# Altium PCB IgniterPCB.PcbDoc
Units mil, origin at the board's own origin, x right, y up, seen from the top; angles counter-clockwise.
Board outline 3000 x 2500 mil, 2 copper layers (Top Layer, Bottom Layer); 42 components, 23 nets, 199 pads, 25 vias.
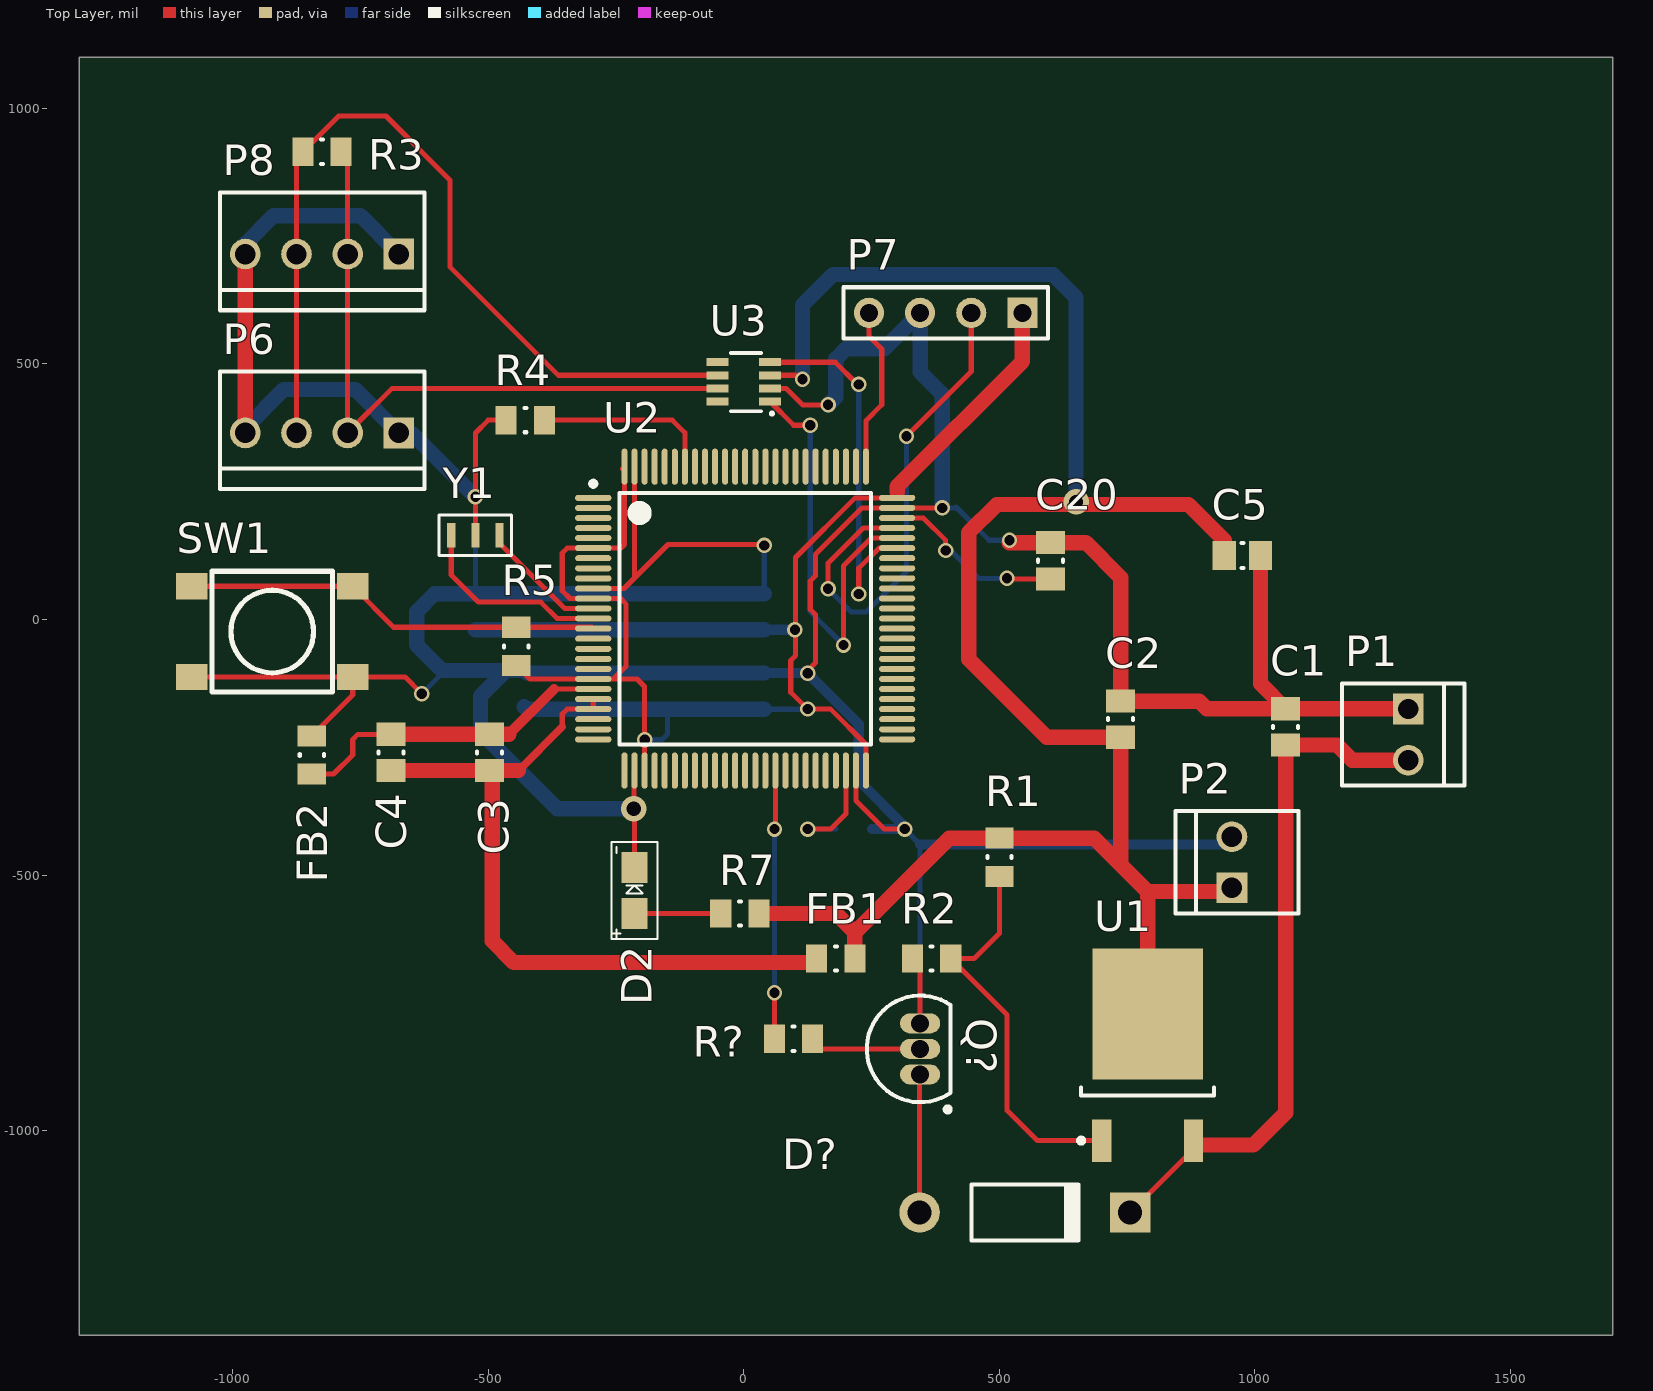
[diagram p0: Top Layer view]
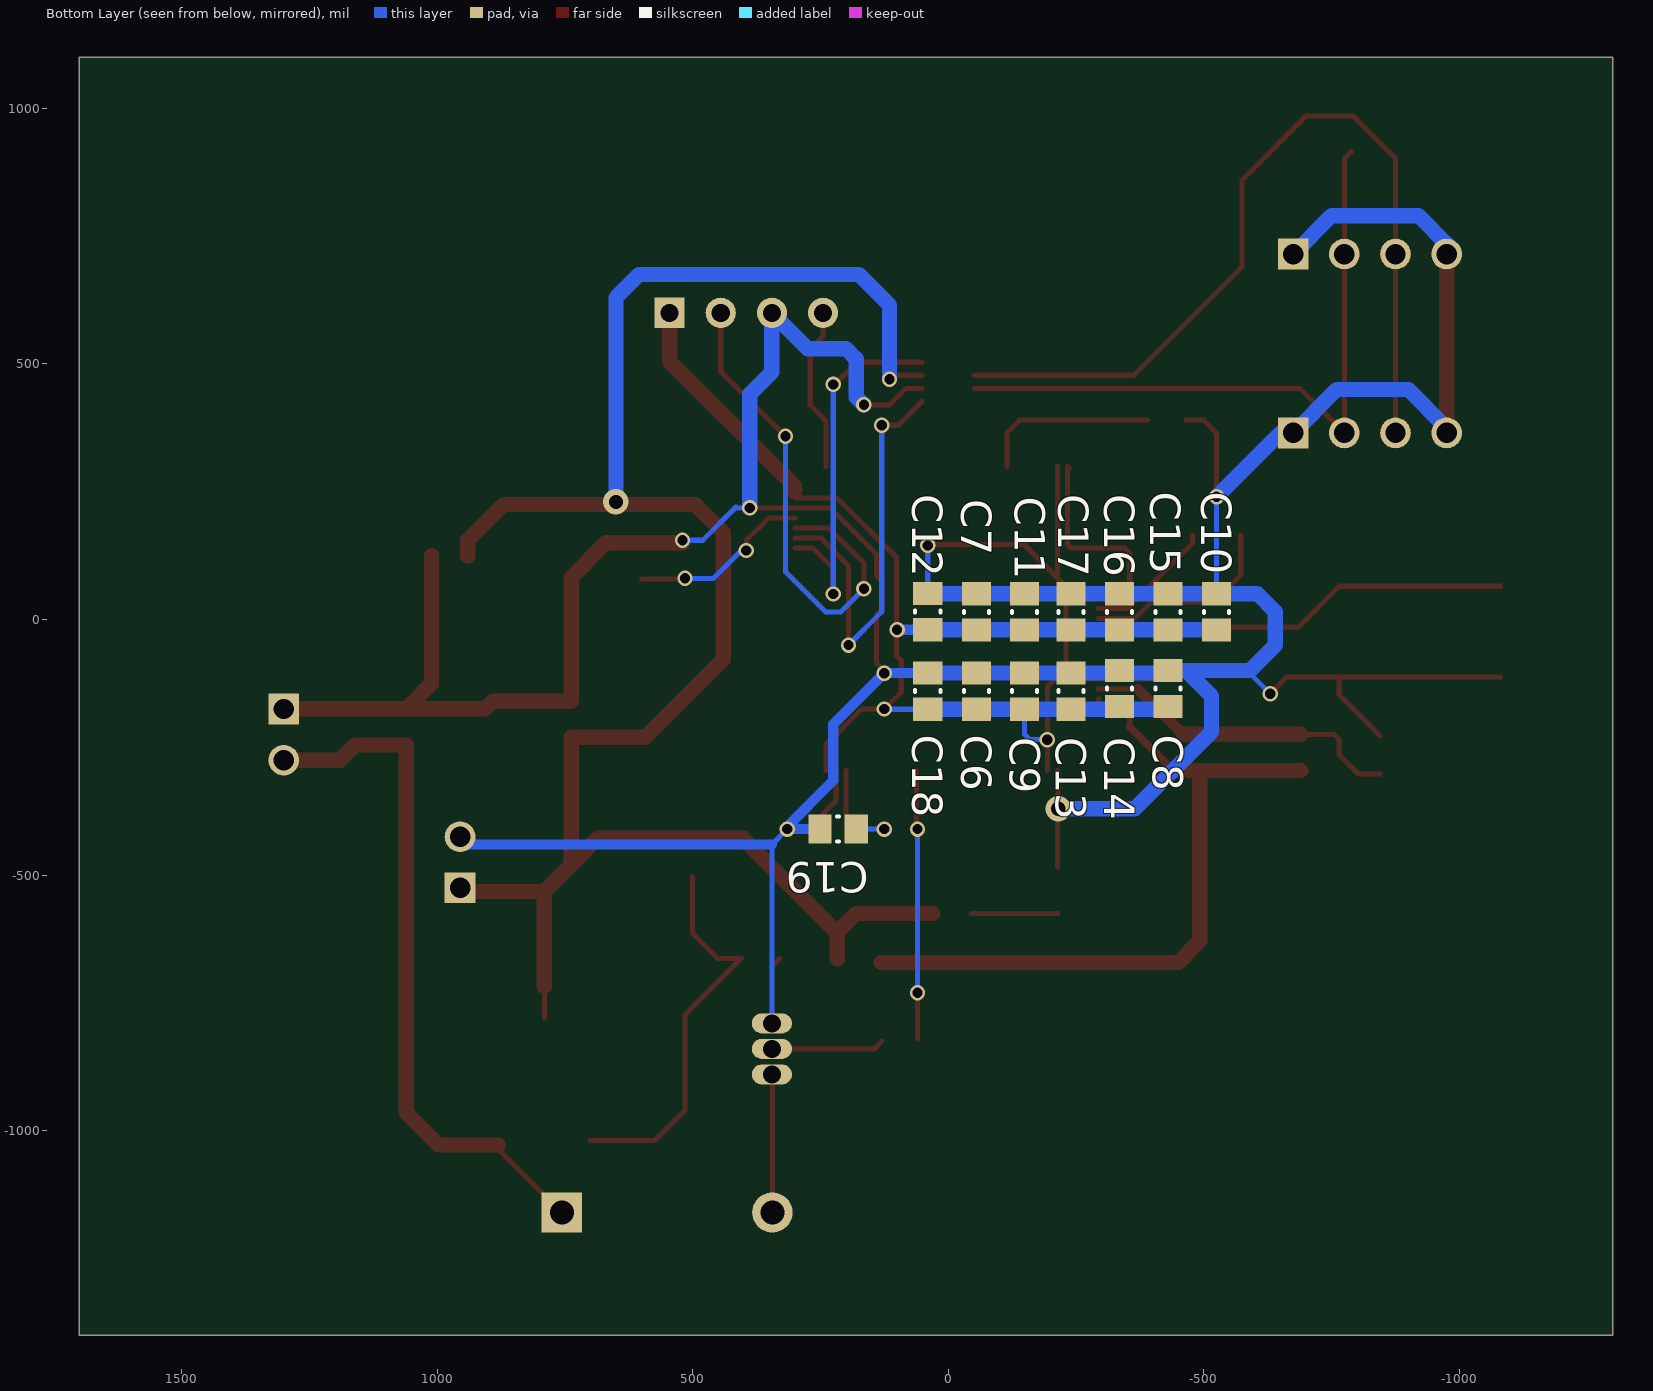
[diagram p1: Bottom Layer view, seen from below]
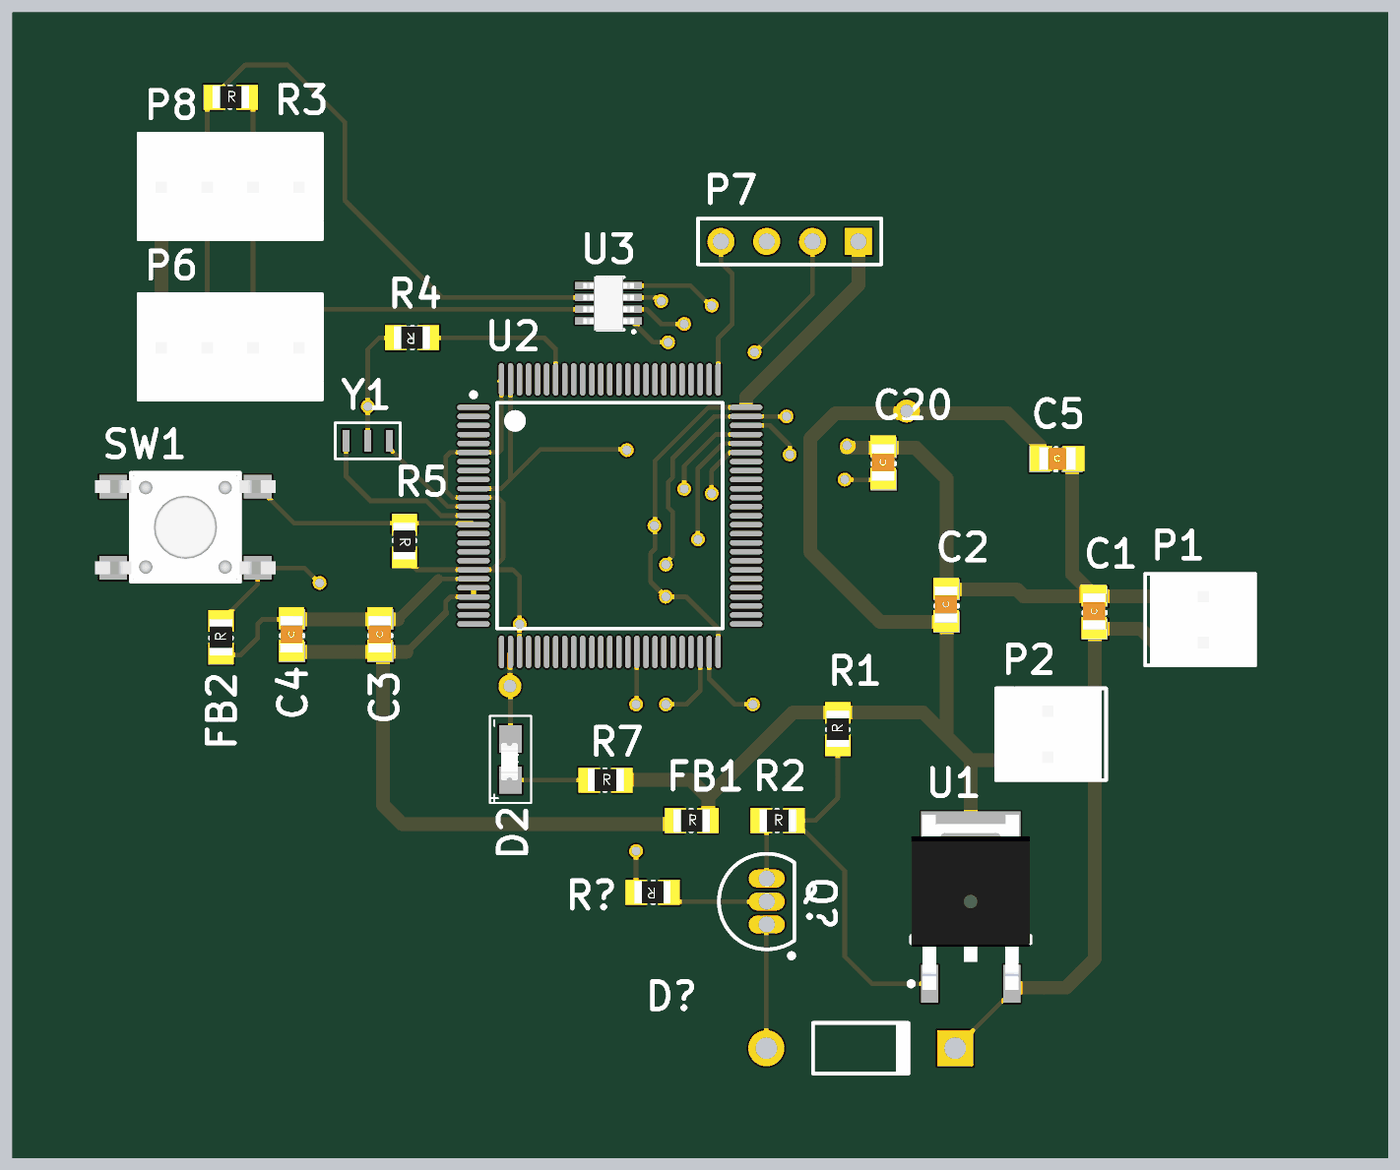
[diagram p2: 3D render of the assembled board from above, using the file's embedded part models]
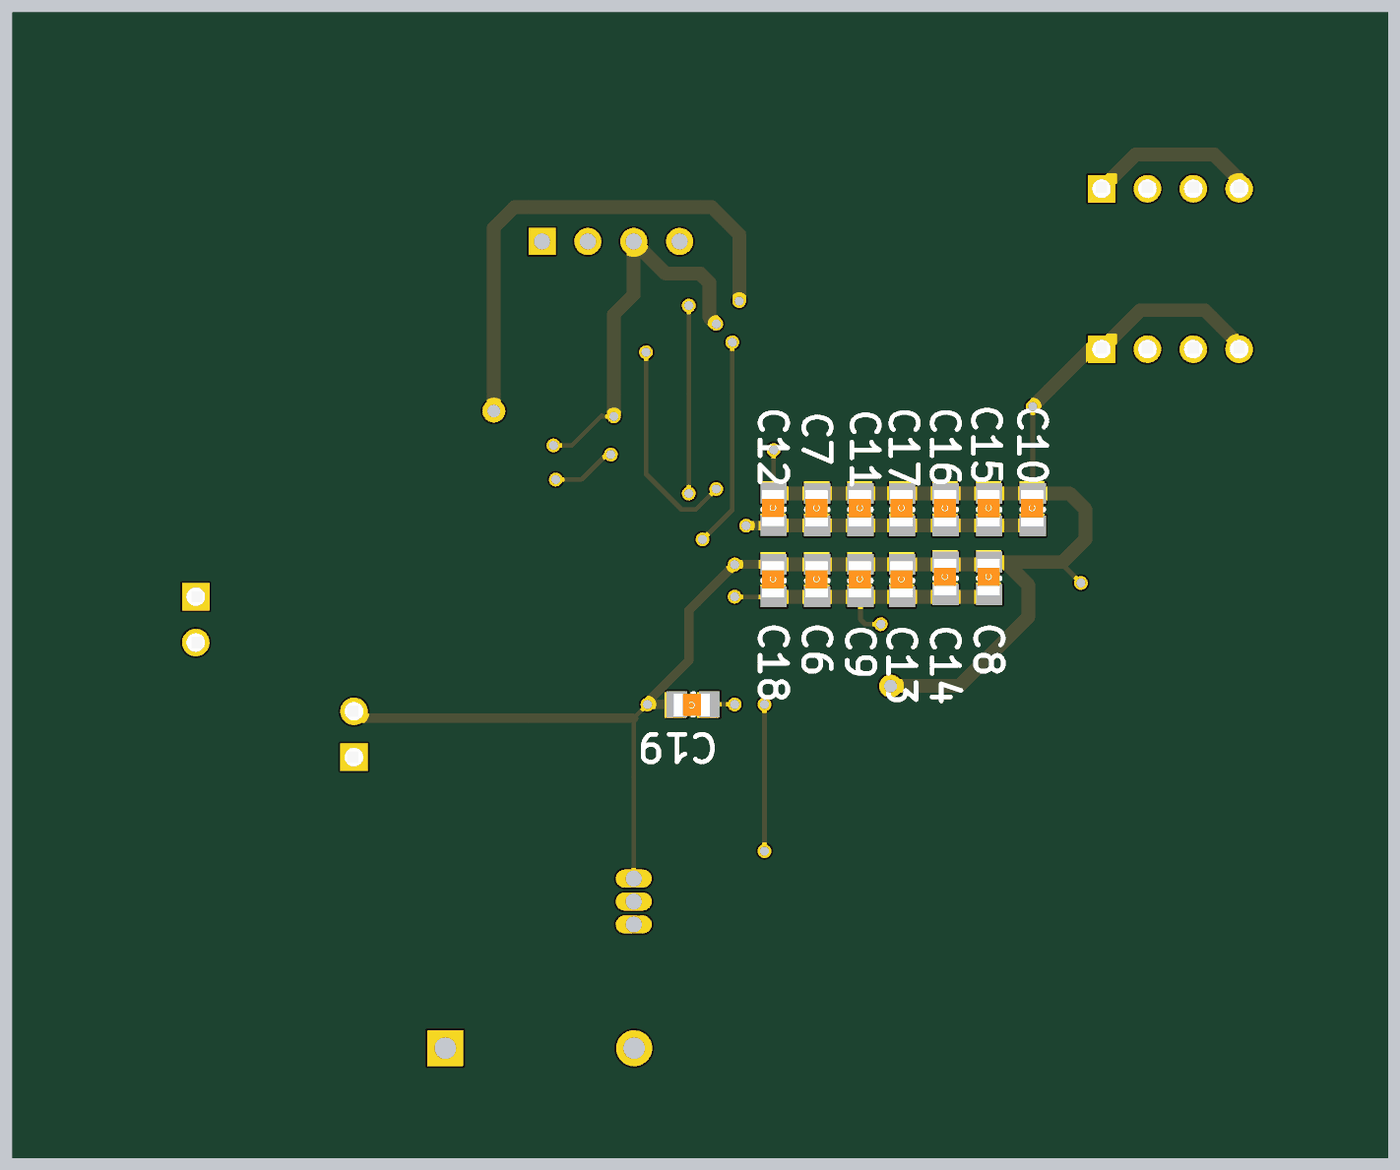
[diagram p3: 3D render of the assembled board from below, using the file's embedded part models]

## Layer stack, top to bottom
Top Solder: solder mask 0.4, Solder Resist, Dk 3.5
Top Layer: signal copper 1.4
Dielectric 1: dielectric 12.6, FR-4, Dk 4.8
Bottom Layer: signal copper 1.4
Bottom Solder: solder mask 0.4, Solder Resist, Dk 3.5

## Board outline
-1300,1100 -1300,-1400 1700,-1400 1700,1100

## Design rules (kind name [scope] priority, off if disabled: settings)
Clearance "Power-to-Non Clearance" [InNetClass('Power')] p1: gap=10 ignorepadtopadclearanceinfootprint=FALSE except(0: Arc-Text Arc-Hole Track-Text Track-Hole SMDPad-Text SMDPad-Hole THPad-Text THPad-Hole Via-Text Via-Hole Fill-Text Fill-Hole Poly-Text Poly-Hole Region-Text Region-Hole Text-Text Text-Hole)
Clearance "Power-to-Power Clearance" [InNetClass('Power') vs InNetClass('Power')] p2: gap=10 ignorepadtopadclearanceinfootprint=FALSE except(0: Arc-Text Arc-Hole Track-Text Track-Hole SMDPad-Text SMDPad-Hole THPad-Text THPad-Hole Via-Text Via-Hole Fill-Text Fill-Hole Poly-Text Poly-Hole Region-Text Region-Hole Text-Text Text-Hole)
Clearance [All] p3: gap=10 ignorepadtopadclearanceinfootprint=TRUE except(0: Arc-Text Arc-Hole Track-Text Track-Hole SMDPad-Text SMDPad-Hole THPad-Text THPad-Hole Via-Text Via-Hole Fill-Text Fill-Hole Poly-Text Poly-Hole Region-Text Region-Hole Text-Text Text-Hole; 2: Arc-Arc Arc-Track Arc-SMDPad Track-Track Track-SMDPad; 5: Arc-Via Track-Via)
MinimumSolderMaskSliver [All] p1 off: minsoldermaskwidth=1.5
PolygonConnect [All] p1: connectstyle=Relief reliefconductorwidth=10 reliefentries=4 polygonreliefangle="90 Angle" airgapwidth=10
RoutingVias [All] p1: holewidth=28 width=50 viastyle="Through Hole" minholewidth=7.87 minwidth=17.72 maxholewidth=28 maxwidth=50
SilkToSolderMaskClearance [IsPad] p1 off: minsilkscreentomaskgap=10 clearancetoexposedcopper=TRUE
SolderMaskExpansion [All] p1: expansion=4
Width "Power Width" [InNetClass('Power')] p1: maxlimit=45 minlimit=10 preferedwidth=10 minimp=50.000000 maximp=50.000000 favimp=50.000000
Width [All] p2: maxlimit=30 minlimit=10 preferedwidth=10 minimp=50.000000 maximp=50.000000 favimp=50.000000
28 further rules are at their usual default settings.

## Classes and differential pairs
component class U_Power: C1 C2 D2 FB1 FB2 P1 P2 R1 R2 R7 U1
component class micro_schematic: C3 C4 C5 C6 C7 C8 C9 C10 C11 C12 C13 C14 C15 C16 C17 C18 C19 C20 P6 P7 P8 R3 R4 R5 SW1 U2 U3 Y1
component class Designator: D1 Q1 R6 U?

## Components (designator, comment, footprint, x,y, rotation, side; value= is the part's Value field where it differs from the comment)
C1 "0.1uF" C0805 1060,-210 r90 top
C2 "1uF" C0805 737.24,-195 r90 top
C3 "100n" C0805 -497.4,-260 r90 top
C4 "1u" C0805 -690,-260 r90 top
C5 "0.1uF" C0805 975.43,125 r0 top
C6 "100n" C0805 -55,-140 r90 bottom
C7 "100n" C0805 -55,15 r90 bottom
C8 "100n" C0805 -430,-135 r90 bottom
C9 "100n" C0805 -149.28,-140 r90 bottom
C10 "4u7" C0805 -525,15 r90 bottom
C11 "100n" C0805 -149.28,15 r90 bottom
C12 "100n" C0805 40,15.43 r90 bottom
C13 "100n" C0805 -240,-140 r90 bottom
C14 "100n" C0805 -335,-135 r90 bottom
C15 "100n" C0805 -430,15 r90 bottom
C16 "100n" C0805 -335,15 r90 bottom
C17 "100n" C0805 -240,15 r90 bottom
C18 "100n" C0805 40,-140 r90 bottom
C19 "*" C0805 215.43,-410 r0 bottom
C20 "*" C0805 600,115 r90 top
D2 "LED" 0805LED -213.7,-575 r90 top
D? "Diode 1N4007" DO-41 550,-1160 r0 top
FB1 "FERRITE" R0805 180,-663.34 r0 top
FB2 "FERRITE" R0805 -845,-265 r90 top
P1 "Molex KK 1x2" "Molex KK 2x1" 1300,-225 r0 top
P2 "Molex KK 1x2" "Molex KK 2x1" 955,-475 r180 top
P6 "Molex KK 1x4" "Molex KK 4x1" -875,365 r270 top
P7 "Header 4" HDR1X4 545,600 r180 top
P8 "Molex KK 1x4" "Molex KK 4x1" -875,715 r270 top
Q? "NPN" TO-226-AA 345,-840 r0 top
R1 "240R" R0805 500,-465 r90 top
R2 "390R" R0805 367.6,-663.34 r0 top
R3 "120R" R0805 -825,915 r0 top
R4 "100R" R0805 -427.4,390 r180 top
R5 "1k" R0805 -445,-52.4 r270 top
R7 "2k" R0805 -7.6,-575 r0 top
R? "1K" R0805 97.4,-820 r180 top
SW1 "Push Switch" PUSHBUTTON -922.48,-23.58 r0 top
U1 "LM317" D-PAK 790,-852.12 r90 top
U2 "MC-ARM-STM32F446-LQFP100" STM-LQFP100_N 2.83,1.81 r0 top
U3 "TCAN332DCNT" SOT-23-8 0,465 r90 top
Y1 "CSTCE8M00" "8MHz Ceramic Resonator" -572.24,165 r0 top

## Footprints (in the part's own frame and the unit in brackets; to place one, negate y for a bottom-side part, rotate by r counter-clockwise, add the part's x,y. Pads: shape width x height; smd on the part's side, far side on the other; paste and mask are expansions set on the pad)
"8MHz Ceramic Resonator" [mm] "8MHz Ceramic Resonator Murata"
  rect 0.4x1.2 smd: 1(0,0) 2(1.2,0) 3(2.4,0)
  silkscreen extent -0.6,-1 3,1
0805LED [mil]
  rect 60x50 smd: A(0,0) K(90,0)
  silkscreen extent -50,-45 140,45, body extent -1,-16 81,20, height 33
C0805 [mm] "Chip Capacitor, Body 2.0x1.2mm, Height 0.75mm, IPC Medium Density"
  rect 1.15x1.45 smd: 1(-0.9,0) 2(0.9,0)
  silkscreen extent -0.05,-0.62 0.05,0.62, body extent -1.42,-0.67 1.58,0.73, height 0.93
D-PAK [mm] "D-PAK, 4-Leads, Body 6.1x6.5mm, Pitch 2.28mm, Lead Span 9.7mm, IPC Medium Density"
  rect 2.1x0.95 smd: 1(-4.25,2.28) 3(-4.25,-2.28)
  rect 6.5x5.5 smd: 4(2.05,0)
  silkscreen extent -4.37,-3.3 -1.6,3.43, body extent -4.6,-3.28 5.1,3.3, height 2.3
DO-41 [mm] "Diode, Axial; Body 5.2 x 2.7 mm (LxDia. max), Lead Dia. 0.86 mm (max)"
  round 2 hole 1.2: 1(-5.23,0)
  rect 2x2 hole 1.2: 2(5.23,0)
  silkscreen extent -2.65,-1.4 2.75,1.4
HDR1X4 [mm] "Connector; Header; 4 Position"
  rect 1.5x1.5 hole 0.9: 1(0,0)
  round 1.5 hole 0.9: 2(2.54,0) 3(5.08,0) 4(7.62,0)
  silkscreen extent -1.27,-1.27 8.89,1.27
"Molex KK 2x1" [mil]
  rect 60x60 hole 40: 1(0,50)
  round 60 hole 40: 2(0,-50)
  silkscreen extent -130,-100 110,100, body extent -120,-100 110,100, height 458
"Molex KK 4x1" [mil]
  rect 60x60 hole 40: 1(0,200)
  round 60 hole 40: 2(0,100) 3(0,0) 4(0,-100)
  silkscreen extent -120,-150 110,250, body extent -120,-150 110,250, height 458
PUSHBUTTON [mm]
  rect 1.55x1.3 smd: 1(-4,2.25) 1(4,2.25) 2(-4,-2.25) 2(4,-2.25)
  silkscreen extent -3,-3 3,3, body extent -5,-3 5,3, height 5.12
R0805 [mm] "Chip Resistor, Body 2.0x1.3mm, IPC Medium Density"
  rect 1.05x1.4 smd: 1(-0.95,0) 2(0.95,0)
  silkscreen extent -0.05,-0.6 0.05,0.6, body extent -1.46,-0.7 1.54,0.7, height 0.53
SOT-23-8 [mm] "SOT-23-8"
  rect 0.4x1.1 smd: 1(-0.975,-1.3) 2(-0.325,-1.3) 3(0.325,-1.3) 4(0.975,-1.3) 5(0.975,1.3) 6(0.325,1.3) 7(-0.325,1.3) 8(-0.975,1.3)
  silkscreen extent -1.65,-1.48 1.44,0.65, body extent -1.5,-1.4 1.5,1.4, height 1.11
STM-LQFP100_N [mm] "Thin QFP, 100-Leads, Body 14x14mm, Pitch 0.5mm, IPC Medium Density"
  oval 1.8x0.3 smd: 1(-7.55,6) 2(-7.55,5.5) 3(-7.55,5) 4(-7.55,4.5) 5(-7.55,4) 6(-7.55,3.5) 7(-7.55,3) 8(-7.55,2.5) 9(-7.55,2) 10(-7.55,1.5) 11(-7.55,1) 12(-7.55,0.5) 13(-7.55,0) 14(-7.55,-0.5) 15(-7.55,-1) 16(-7.55,-1.5) 17(-7.55,-2) 18(-7.55,-2.5) 19(-7.55,-3) 20(-7.55,-3.5) 21(-7.55,-4) 22(-7.55,-4.5) 23(-7.55,-5) 24(-7.55,-5.5) 25(-7.55,-6) 51(7.55,-6) 52(7.55,-5.5) 53(7.55,-5) 54(7.55,-4.5) 55(7.55,-4) 56(7.55,-3.5) 57(7.55,-3) 58(7.55,-2.5) 59(7.55,-2) 60(7.55,-1.5) 61(7.55,-1) 62(7.55,-0.5) 63(7.55,0) 64(7.55,0.5) 65(7.55,1) 66(7.55,1.5) 67(7.55,2) 68(7.55,2.5) 69(7.55,3) 70(7.55,3.5) 71(7.55,4) 72(7.55,4.5) 73(7.55,5) 74(7.55,5.5) 75(7.55,6)
  oval 0.3x1.8 smd: 26(-6,-7.55) 27(-5.5,-7.55) 28(-5,-7.55) 29(-4.5,-7.55) 30(-4,-7.55) 31(-3.5,-7.55) 32(-3,-7.55) 33(-2.5,-7.55) 34(-2,-7.55) 35(-1.5,-7.55) 36(-1,-7.55) 37(-0.5,-7.55) 38(0,-7.55) 39(0.5,-7.55) 40(1,-7.55) 41(1.5,-7.55) 42(2,-7.55) 43(2.5,-7.55) 44(3,-7.55) 45(3.5,-7.55) 46(4,-7.55) 47(4.5,-7.55) 48(5,-7.55) 49(5.5,-7.55) 50(6,-7.55) 76(6,7.55) 77(5.5,7.55) 78(5,7.55) 79(4.5,7.55) 80(4,7.55) 81(3.5,7.55) 82(3,7.55) 83(2.5,7.55) 84(2,7.55) 85(1.5,7.55) 86(1,7.55) 87(0.5,7.55) 88(0,7.55) 89(-0.5,7.55) 90(-1,7.55) 91(-1.5,7.55) 92(-2,7.55) 93(-2.5,7.55) 94(-3,7.55) 95(-3.5,7.55) 96(-4,7.55) 97(-4.5,7.55) 98(-5,7.55) 99(-5.5,7.55) 100(-6,7.55)
  silkscreen extent -7.67,-6.25 6.25,6.82, body extent -7,-7 7,7, height 1.6
TO-226-AA [mm] "TO, Flat Index; 3 In-Line, Axial Leads; Body Dia. 4.8mm; Leads 0.55 x 0.51 mm (max)"
  oval 2x1 hole 0.9: 1(0,-1.27) 2(0,0) 3(0,1.27)
  silkscreen extent -2.65,-3.13 1.52,2.65, body extent -2.65,-2.66 1.52,2.66, height 5.33

## Part data
C1 C2 C3 C4 C5 C6 C7 C8 C9 C10 C11 C12 C13 C14 C15 C16 C17 C18 C19 C20: library part C0805, "0805 Capacitor"
D2: Manufacturer="OSRAM Opto Semiconductors Inc", Manufacturer Part Number="LS T676-Q1R2-1-Z", Reel=D13
D?: "1 Amp General Purpose Rectifier", Code_JEDEC=DO-204-AL, ComponentLink1Description="Manufacturer Link", ComponentLink1URL=http://www.fairchildsemi.com/, ComponentLink2Description=Datasheet, ComponentLink2URL=http://www.fairchildsemi.com/ds/1N%2F1N4001.pdf, DatasheetVersion=1998, LatestRevisionDate=17-Jul-2002, LatestRevisionNote="Re-released for DXP Platform.", PackageDescription="Diode, Axial; Body 5.2 x 2.7 mm (LxDia. max), Lead Dia. 0.86 mm (max)", PackageReference=DO-41, PackageVersion=Aug-1999, Published=8-Jun-2000, Publisher="Altium Limited"
FB1 FB2: "FERRITE BEAD 0805"
P1 P2: "1x2 Molex KK Connector"
P6 P8: "1x4 Molex KK Connector"
P7: "Header, 4-Pin", LatestRevisionDate=17-Jul-2002, LatestRevisionNote="Re-released for DXP Platform.", Publisher="Altium Limited"
Q?: "NPN Bipolar Transistor", Code_JEDEC=TO-226-AA, LatestRevisionDate=17-Jul-2002, LatestRevisionNote="Re-released for DXP Platform.", PackageDescription="TO, Flat Index; 3 In-Line, Axial Leads; Body Dia. 4.8mm; Leads 0.55 x 0.51 mm (max)", PackageReference=TO-226-AA, Published=8-Jun-2000, Publisher="Altium Limited"
R1 R2 R3 R4 R5 R7 R?: library part R0805, "RESISTOR 0805"
SW1: library part PUSHBUTTON
U1: "Linear Voltage Regulator"
U3: "IC TXRX CAN 3.3V SOT23-8"
Y1: "8MHz Ceramic Resonator"

## Via types
v1: diameter 30, hole 20, Top Layer to Bottom Layer, 23 vias
v2: diameter 50, hole 28, Top Layer to Bottom Layer, 2 vias

## Nets (pads, with @x,y where several pads share a name; then routed paths per layer and width w, separated by ;. In a path a pad name is that pad's centre, name@x,y a point inside that pad or via, vN(x,y) a via of type N, cw(c..) or ccw(c..) an arc to the next point about the centre after c; other vN are vias at no path point)
3V3_AVDD: C3.1 C4.1 FB1.1 U2.21 U2.22 | length 1453.5
  Top Layer w10: -355,-209.72 -355,-185 -345.35,-175.35 U2.22 U2.21
  Top Layer w15: -440.71,-295.43 -355,-209.72
  Top Layer w30: C4.1 -594,-295.43 C3.1 C3.1@-492,-295.43 ; -440.71,-295.43 C3.1@-492,-295.43 ; FB1.1@131,-671 -450,-671 -492,-629 C3.1@-492,-295.43
3V3_DVDD: C6.1 C7.1 C8.1 C9.1 C10.1 C11.1 C12.1 C13.1 C14.1 C15.1 C16.1 C17.1 C18.1 P7.1 R5.2 U2.6 U2.11 U2.19 U2.28 U2.50 U2.75 U2.100 | length 3571.9
  Top Layer w10: R5.2 -418.5,-116.3 U2.19 -255,-116.3 ; U2.100@-237.44,295 U2.100 -233.39,146.61 -240.39,139.61 U2.6 -345.39,139.61 -355,130 -355,56.18 -340,41.18 U2.11 -241.18,41.18 -230,30 -230,-91.3 -255,-116.3 ; U2.28 -194.02,-130.98 -208.7,-116.3 -255,-116.3 ; U2.50 239.06,-244.41 170,-175.35 125,-175.35 91.93,-142.28 91.93,-80 101.26,-70.67 101.26,121.26 218.03,238.03 U2.75
  Top Layer w30: 300,250 300,260 545,505 P7.1
  Bottom Layer w10: v1(-193.7,-235) -160,-235 -149.28,-224.28 C9.1 ; C18.1 v1@124.92,-175.43
  Bottom Layer w20: C12.1 v1(100,-20)
  Bottom Layer w30: C10.1 -524.57,-20 C12.1 ; C8.1 -425,-175.43 C13.1 C9.1 C6.1 C18.1
  other v1: 125,-175
AGND: C3.2 C4.2 FB2.1 U2.20 | length 637.4
  Top Layer w10: FB2.1 -802.4,-302.4 -765,-265 -765,-234.57 -755,-224.57 C4.2 ; -370.98,-135.98 U2.20
  Top Layer w20: -459.57,-224.57 -370.98,-135.98
  Top Layer w30: C4.2 C3.2 -459.57,-224.57
CANRX: U2.70 U3.4 | length 745.6
  Top Layer w10: U3.4 179.02,503.39 v1@218.7,463.7 ; v1(225,50) 225,100.24 264.37,139.61 U2.70 ; v1(225,460) v1@225,470
  Bottom Layer w10: v1(225,50) v1(225,460)
CANTX: U2.71 U3.1 | length 837.6
  Top Layer w10: U3.1 97.79,380 v1(130,380) ; v1(195,-50) 195,105 249.29,159.29 U2.71
  Bottom Layer w10: v1(130,380) 130,15 v1(195,-50)
DGND: C1.2 C2.2 C5.2 C6.2 C7.2 C8.2 C9.2 C10.2 C11.2 C12.2 C13.2 C14.2 C15.2 C16.2 C17.2 C18.2 C19.2 C20.2 D2.K FB2.2 P1.1 P2.2 P6.1 P6.4 P7.3 P8.1 P8.4 Q?.3 R2.1 R4.2 SW1.2 U2.10 U2.27 U2.49 U2.74 U2.99 U3.2 Y1.2 | length 10017.3
  Top Layer w10: SW1.2@-1079.96,-112.17 SW1.2@-765,-112.17 ; FB2.2 -765,-147.6 SW1.2@-765,-112.17 ; v1(-630,-145) -662.83,-112.17 SW1.2@-765,-112.17 ; Y1.2 v1@-525,230 ; v1(-525,240) -525,365 -500,390 R4.2 ; U2.10 -234.13,60.87 -213.7,81.3 ; D2.K -213.7,-371.3 v2(-215,-370) -215,-296.73 U2.27 ; U2.99 -213.7,81.3 ; v1@40,146.61 -148.39,146.61 -213.7,81.3 ; U3.2 82.8,452.2 115,420 v1(165,420) ; v1(125,-105) 125,-100 140,-85 140,10 130,20 130,75 140,85 140,127.4 230.94,218.35 U2.74 v1(388.35,218.35) ; U2.49 219.37,-354.37 275,-410 v1(315,-410) ; R2.1 345,-678.14 Q?.3 ; P1.1@1299.57,-174.57 P1.1
  Top Layer w30: P6.4 P8.4 ; v1@519.57,150.43 C20.2 669.13,150.43 737.24,82.32 C2.2 891,-159.57 906,-174.57 C1.2 ; C5.2 1010.87,-125.43 C1.2 ; P1.1@1299.57,-174.57 C1.2
  Bottom Layer w10: P6.4 P6.4@-975,375 ; P8.4 P8.4@-975,735 ; P6.1 P6.1@-650,365 ; v1(-630,-145) -590,-105 -590,-99.57 ; C10.2 v1(-525,240) ; C12.2 v1(40,145) ; v1(315,-410) 345,-440 Q?.3 ; 385,444.09 388.35,440.75 ; v1(388.35,218.35) 413.35,218.35 415,220 480,155 v1(520,155) ; P2.2@940,-440 P2.2
  Bottom Layer w20: C18.2 v1@124.57,-104.57 ; v1(125,-105) 225,-205 225,-315 320,-410 v1(315,-410) C19.2 ; 345,-440 P2.2@940,-440
  Bottom Layer w30: P6.4@-975,375 -900,450 -760,450 P6.1 ; P8.4@-975,735 -920,790 -750,790 P8.1 ; P6.1@-650,365 v1(-525,240) ; v2(-215,-370) -365,-370 -515,-220 -515,-149.57 -465,-99.57 ; C18.2 C6.2 C13.2 -425,-104.57 C8.2 -465,-99.57 ; C12.2@40,50.43 C15.2 C10.2 -604.57,50.43 -640,15 -640,-49.57 -590,-99.57 -465,-99.57 ; v1@124.57,-104.57 v1(125,-105) ; v1(165,420) 180,435 180,510 200,530 275,530 P7.3 345,484.09 385,444.09 ; v1(388.35,218.35) 388.35,440.75
NetC19_1: C19.1 U2.48 | length 226.9
  Top Layer w10: v1(125,-410) 170,-410 199.69,-380.31 U2.48
  Bottom Layer w10: v1(125,-410) C19.1
NetC20_1: C20.1 U2.73 | length 364.6
  Top Layer w10: U2.73 351.34,198.66 395,155 v1(395,135) ; v1@510.98,79.57 C20.1
  Bottom Layer w10: v1(395,135) 405,135 459.45,80.55 v1(515,80.55)
NetD2_A: D2.A R7.1 | length 168.7
  Top Layer w10: D2.A R7.1
NetD?_1: D?.1 Q?.1 | length 270.4
  Top Layer w10: D?.1 344.09,-890.91 Q?.1
NetP6_2: P6.2 P8.2 R3.2 U3.7 | length 1315.2
  Top Layer w10: R3.2 -775,902.4 P8.2 P6.2 -687.8,452.2 U3.7
NetP6_3: P6.3 P8.3 R3.1 U3.6 | length 1705.1
  Top Layer w10: P6.3 P8.3 -875,902.4 R3.1 -792.4,985 -700,985 -575,860 -575,690 -362.8,477.8 U3.6
NetQ?_2: Q?.2 R?.1 | length 221.3
  Top Layer w10: R?.1@130,-824.8 145.2,-840 Q?.2
NetR1_1: R1.1 R2.2 U1.1 | length 779.1
  Top Layer w10: R1.1 500,-614 450.66,-663.34 R2.2 515,-773.34 515,-960 574.44,-1019.44 U1.1
NetR4_1: R4.1 U2.94 | length 351.2
  Top Layer w10: R4.1 -140,390 -115.28,365.28 U2.94
NetR5_1: R5.1 SW1.1 U2.14 | length 819.9
  Top Layer w10: SW1.1@-1079.96,65 -765,65 -685,-15 R5.1 -297.28,-15 U2.14
NetR?_2: R?.2 U2.41 | length 517.7
  Top Layer w10: R?.2 v1@60,-735 ; v1@61.89,-408.11 U2.41
  Bottom Layer w10: v1(60,-730) v1(60,-410)
NetU2_12: U2.12 Y1.3 | length 252
  Top Layer w10: Y1.3 -477.76,149.25 -350,21.5 U2.12
NetU2_13: U2.13 Y1.1 | length 391
  Top Layer w10: Y1.1 -572.24,87.24 -518.98,33.98 -397.16,33.98 -365,1.81 U2.13
SWCLK: P7.4 U2.76 | length 324.1
  Top Layer w10: U2.76 239.06,389.06 270,420 270,529.29 245,554.29 P7.4
SWDIO: P7.2 U2.72 | length 974.9
  Top Layer w10: v1(165,60) 165,110 233.98,178.98 U2.72 ; v1@320,360 445,485 P7.2
  Bottom Layer w10: v1(165,60) 210,15 240,15 318.35,93.35 v1(318.35,358.35)
"V+ 12V": C1.1 D?.2 P1.2 U1.3 | length 1361.5
  Top Layer w10: D?.2 879.76,-1036.14 U1.3@879.76,-1028
  Top Layer w30: U1.3@879.76,-1028 997,-1028 1060,-965 C1.1 1160.43,-245.43 1190,-275 P1.2
VOUT_3.3V: C2.1 C5.1 FB1.2 P2.1 R1.2 R7.2 U1.4 U3.3 | length 3993.5
  Top Layer w10: U3.3 102.2,477.8 v1@110,470 ; FB1.2@217.4,-671 FB1.2 ; U1.4@790,-779.29 U1.4 U1.4@790,-717.6
  Top Layer w30: R7.2 180,-575 217.4,-612.4 ; FB1.2 217.4,-612.4 ; U1.4@790,-717.6 790,-532 ; C5.1 940,155 870,225 495,225 440,170 440,-77.43 593,-230.43 C2.1 737.24,-479.24 ; P2.1 948,-532 790,-532 ; 217.4,-612.4 402.21,-427.6 R1.2 685.6,-427.6 737.24,-479.24 ; 737.24,-479.24 790,-532
  Bottom Layer w30: v1(115,470) 115,615 175,675 605,675 650,630 v2(650,230)
pads on no net: U2.1 U2.2 U2.3 U2.4 U2.5 U2.7 U2.8 U2.9 U2.15 U2.16 U2.17 U2.18 U2.23 U2.24 U2.25 U2.26 U2.29 U2.30 U2.31 U2.32 U2.33 U2.34 U2.35 U2.36 U2.37 U2.38 U2.39 U2.40 U2.42 U2.43 U2.44 U2.45 U2.46 U2.47 U2.51 U2.52 U2.53 U2.54 U2.55 U2.56 U2.57 U2.58 U2.59 U2.60 U2.61 U2.62 U2.63 U2.64 U2.65 U2.66 U2.67 U2.68 U2.69 U2.77 U2.78 U2.79 U2.80 U2.81 U2.82 U2.83 U2.84 U2.85 U2.86 U2.87 U2.88 U2.89 U2.90 U2.91 U2.92 U2.93 U2.95 U2.96 U2.97 U2.98 U3.5 U3.8